# EAGLE board Intento de pcb (EAGLE 9.6.2)
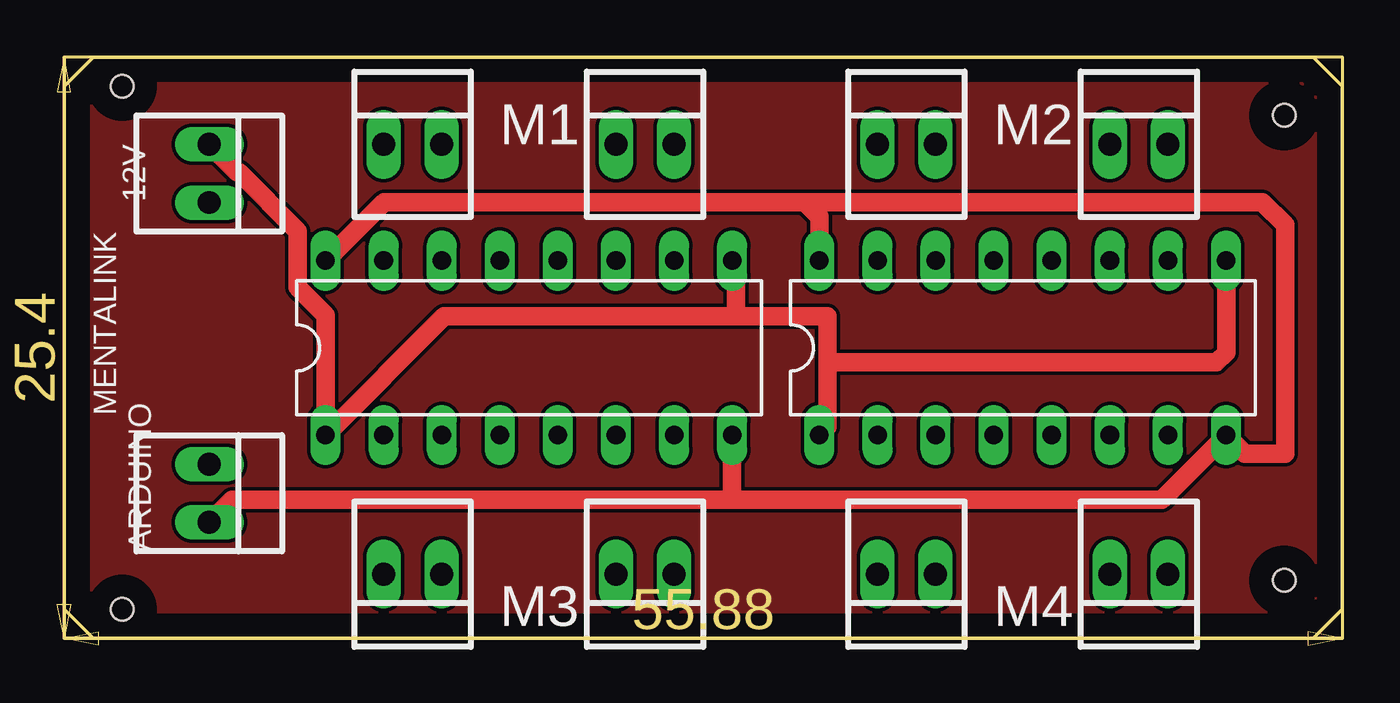
[diagram p0: board, top side]
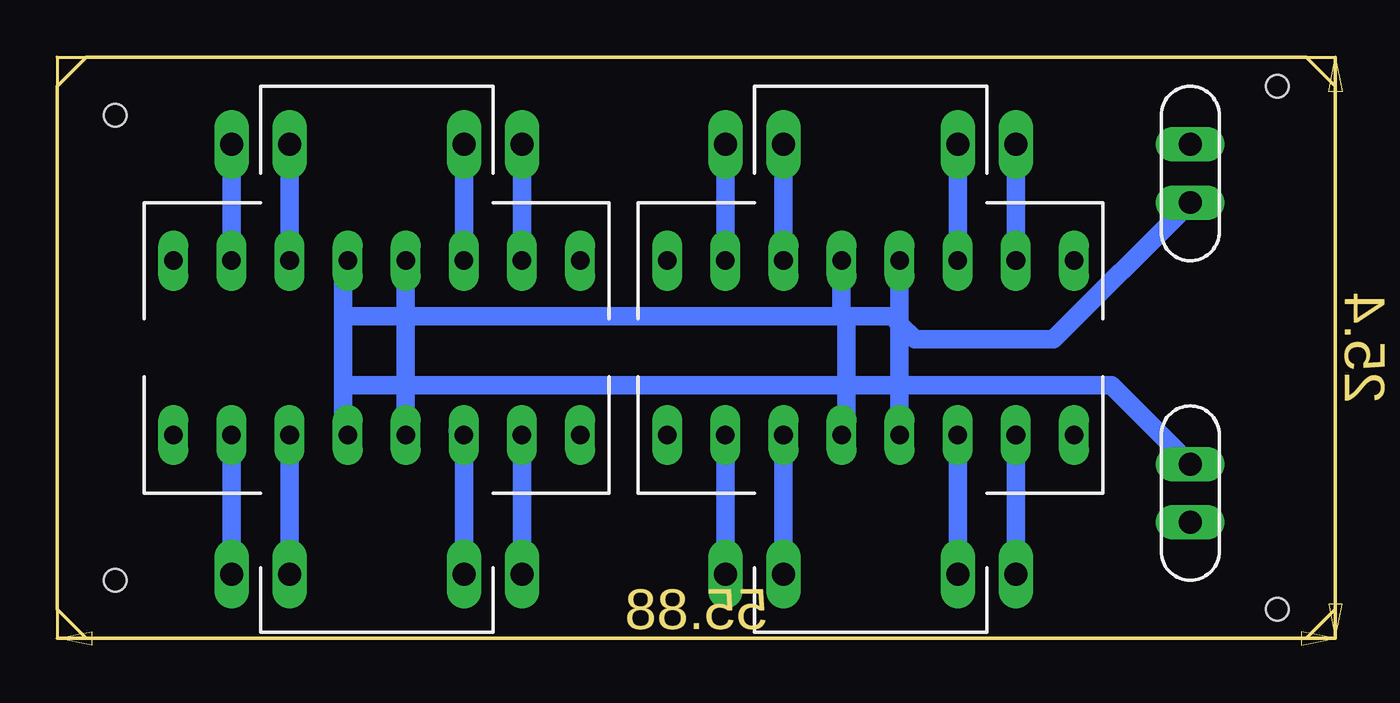
[diagram p1: board, bottom side, seen from below]

Size 55.88 x 25.4 mm. Coordinates in mm from the lower left corner, seen from the top.
Outline: 0,1.27 1.27,0 54.61,0 55.88,1.27 55.88,24.13 54.61,25.4 1.27,25.4 0,24.13 0,1.27
Copper layers (1*16): Top 0.035mm / dielectric 1.5mm / Bottom 0.035mm
Design rules "default": minimum track width 6mil, minimum drill 0.35mm, track to track 6mil, track to pad 6mil, pad to pad 6mil, via to via 6mil, smd to smd 6mil, copper to edge 40mil, drill to drill 6mil, minimum pad ring 10mil, minimum via ring 8mil, stop-mask expansion 4mil, vias tented up to drill 0mil, thermal gap 10mil
Holes 1 mm at 2.54,24.13 2.54,1.27 53.34,22.86 53.34,2.54

## Footprints (pad centres in the part's own frame; a part is rotated, then mirrored left to right if it is on the bottom)
22-23-2021 = drill 1 long: 1 -1.27,0; 2 1.27,0
DIL16 = drill 0.813 long: 1 -8.89,-3.81; 2 -6.35,-3.81; 3 -3.81,-3.81; 4 -1.27,-3.81; 5 1.27,-3.81; 6 3.81,-3.81; 7 6.35,-3.81; 8 8.89,-3.81; 9 8.89,3.81; 10 6.35,3.81; 11 3.81,3.81; 12 1.27,3.81; 13 -1.27,3.81; 14 -3.81,3.81; 15 -6.35,3.81; 16 -8.89,3.81

## Placement (x,y rotation side)
12V  22-23-2021  [22-23-2021]  6.35,20.32 270 top
ARDUINO  22-23-2021  [22-23-2021]  6.35,6.35 270 top
IC1  L293D  [DIL16]  20.32,12.7 0 top
IC2  L293D  [DIL16]  41.91,12.7 0 top
X3  22-23-2021  [22-23-2021]  15.24,2.81 180 top
X4  22-23-2021  [22-23-2021]  25.4,2.81 180 top
X5  22-23-2021  [22-23-2021]  36.83,2.81 180 top
X6  22-23-2021  [22-23-2021]  46.99,2.81 180 top
X7  22-23-2021  [22-23-2021]  46.99,21.59 0 top
X8  22-23-2021  [22-23-2021]  36.83,21.59 0 top
X9  22-23-2021  [22-23-2021]  25.4,21.59 0 top
X10  22-23-2021  [22-23-2021]  15.24,21.59 0 top

## Library data of the parts
12V ARDUINO X3-X10 = con-molex; MF: MOLEX; MPN: 22-23-2021; OC_FARNELL: 1462926; OC_NEWARK: 25C3832
IC1 IC2 = st-microelectronics; MPN: L293D; OC_FARNELL: 9589619; OC_NEWARK: 56P8249

## Nets
S$1: 12V.2 ARDUINO.1 IC1.4 IC1.5 IC1.12 IC1.13 IC2.4 IC2.5 IC2.12 IC2.13
S$2: IC1.2 X3.2
S$3: IC1.3 X3.1
S$4: IC1.6 X4.2
S$5: IC1.7 X4.1
S$6: IC2.2 X5.2
S$7: IC2.3 X5.1
S$8: IC2.6 X6.2
S$9: IC2.7 X6.1
S$10: IC1.15 X10.1
S$11: IC1.14 X10.2
S$12: IC1.11 X9.1
S$13: IC1.10 X9.2
S$14: IC2.15 X8.1
S$15: IC2.14 X8.2
S$16: IC2.11 X7.1
S$17: IC2.10 X7.2
S$18: ARDUINO.2 IC1.8 IC1.16 IC2.8 IC2.16
S$19: 12V.1 IC1.1 IC1.9 IC2.1 IC2.9

## Tracks (layer width: path | path; a pad name or v marks a point on that pad's centre or on a via)
GND
  pour Top: 1,25.4 54.88,25.4 54.88,0 1,0
S$1
  Bottom 0.152: 21.59,14.28 21.38,14.07 | 21.38,9.1 IC1.5
  Bottom 0.813: 12V.2 12.33,13.07 18.38,13.07 19.05,13.74 | 19.05,13.74 IC1.13 | 19.05,13.74 19.05,11.07 | IC1.4 19.05,11.07 | 19.05,13.74 19.38,14.07 21.38,14.07 | 21.59,14.28 IC1.12 | 21.38,9.1 21.38,11.07 | 21.38,14.07 21.38,11.07 | 21.38,14.07 40.38,14.07 | 40.38,14.07 40.64,14.33 IC2.13 | 40.38,14.07 43.38,14.07 | 43.38,14.07 43.38,16.31 IC2.12 | 43.38,14.07 43.38,11.07 | 43.38,11.07 43.38,9.09 IC2.5 | 40.38,14.07 40.64,13.81 40.64,11.07 | 40.64,11.07 IC2.4 | ARDUINO.1 9.8,11.07 19.05,11.07 | 19.05,11.07 21.38,11.07 | 21.38,11.07 40.64,11.07 | 40.64,11.07 43.38,11.07
S$2
  Bottom 0.813: IC1.2 X3.2
S$3
  Bottom 0.813: IC1.3 X3.1
S$4
  Bottom 0.813: IC1.6 X4.2
S$5
  Bottom 0.813: IC1.7 X4.1
S$6
  Bottom 0.813: X5.2 IC2.2
S$7
  Bottom 0.813: X5.1 38.1,8.79 38.38,9.07 38.28,9.07 IC2.3
S$8
  Bottom 0.813: X6.2 IC2.6
S$9
  Bottom 0.813: X6.1 IC2.7
S$10
  Bottom 0.813: X10.1 IC1.15
S$11
  Bottom 0.813: X10.2 IC1.14
S$12
  Bottom 0.813: X9.1 IC1.11
S$13
  Bottom 0.813: X9.2 IC1.10
S$14
  Bottom 0.813: X8.1 IC2.15
S$15
  Bottom 0.813: X8.2 IC2.14
S$16
  Bottom 0.813: X7.1 IC2.11
S$17
  Bottom 0.813: X7.2 IC2.10
S$18
  Top 0.813: IC1.16 13.99,19.07 32.38,19.07 | 32.38,19.07 33.02,18.43 IC2.16 | 32.38,19.07 52.38,19.07 53.38,18.07 53.38,8.07 51.62,8.07 IC2.8 47.98,6.07 29.38,6.07 | 29.38,6.07 29.21,6.24 IC1.8 | 29.38,6.07 7.34,6.07 ARDUINO.2
S$19
  Top 0.813: 12V.1 7.58,20.36 7.65,20.36 10.21,17.8 10.21,15.34 11.43,14.12 IC1.1 16.61,14.07 29.38,14.07 | 29.38,14.07 29.38,16.34 IC1.9 | 29.38,14.07 33.38,14.07 33.38,12.07 | 33.38,12.07 33.38,9.25 IC2.1 | 33.38,12.07 50.38,12.07 50.8,12.49 IC2.9

## Text on the board
tNames: M1 | M2 | MENTALINK | M3 | M4